# Altium PCB PCB1.PcbDoc
Units mil, origin at the board's own origin, x right, y up, seen from the top; angles counter-clockwise.
Board outline 457.48 x 807.09 mil, 2 copper layers (Top Layer, Bottom Layer), stack 61.811 mil thick; 3 components, 4 nets, 12 pads, 0 vias.
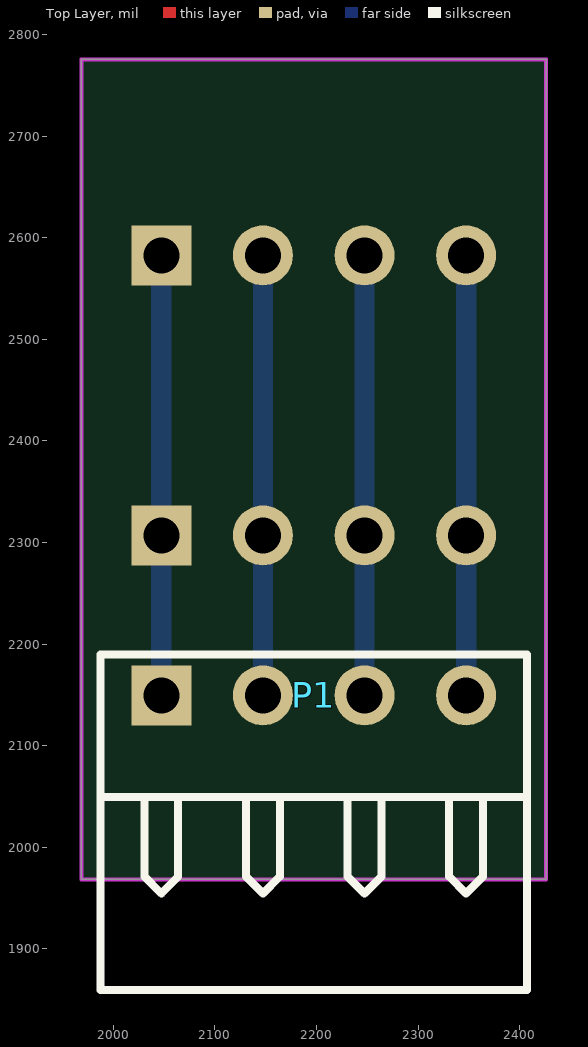
[diagram p0: Top Layer view]
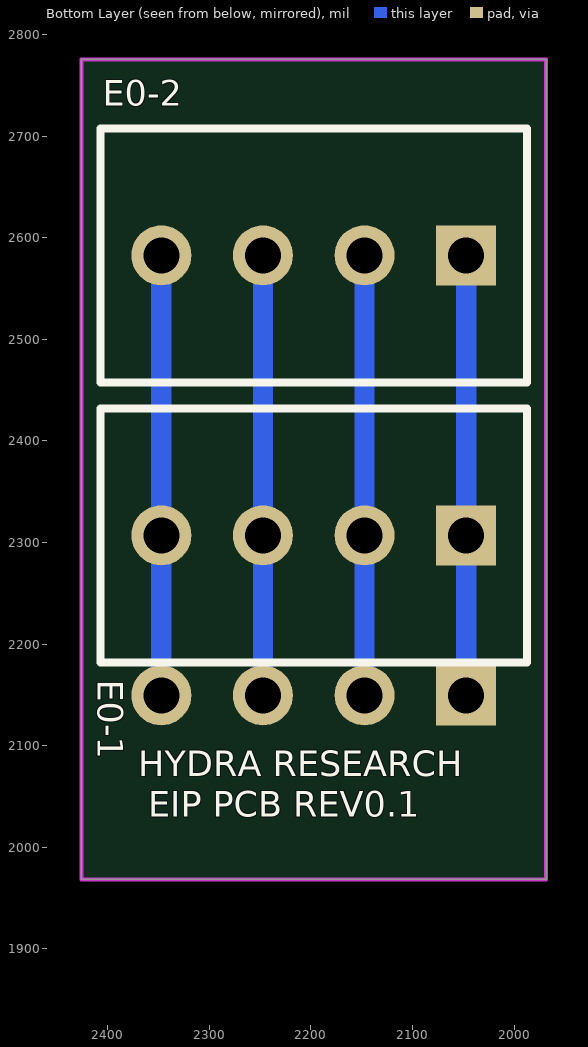
[diagram p1: Bottom Layer view, seen from below]

## Layer stack, top to bottom
Top Solder: solder mask 0.3937, Solder Resist, Dk 3.5
Top Layer: signal copper 1.378
Dielectric 1: dielectric 59.0551, FR-4, Dk 4.8
Bottom Layer: signal copper 1.378
Bottom Solder: solder mask 0.3937, Solder Resist, Dk 3.5

## Board outline
1968.5,1968.5 2425.98,1968.5 2425.98,2775.59 1968.5,2775.59

## Design rules (kind name [scope] priority, off if disabled: settings)
Clearance [All] p1: gap=10 ignorepadtopadclearanceinfootprint=FALSE except(0: Arc-Hole Track-Hole SMDPad-Hole THPad-Hole Via-Hole Fill-Hole Poly-Hole Region-Hole Text-Hole; 0.39: Arc-Arc Arc-Track Arc-SMDPad Arc-THPad Track-Track Track-SMDPad Track-THPad SMDPad-SMDPad SMDPad-THPad THPad-THPad)
ComponentClearance [All] p1: gap=9.84 collisioncheckmode=3 verticalgap=0 showdistances=FALSE
MinimumSolderMaskSliver [All] p1: minsoldermaskwidth=1
PolygonConnect [All] p1: connectstyle=Relief reliefconductorwidth=10 reliefentries=4 polygonreliefangle="90 Angle" airgapwidth=10
RoomDefinition "EIP PCB0.1" [InComponentClass('EIP PCB0.1')] p1 off: confinementstyle=ConfineIn formatcopy=TRUE lockcomponents=FALSE outline 2900.5,2960 5285.5,2960 5285.5,4270.47 2900.5,4270.47
RoutingVias [All] p1: holewidth=28 width=50 viastyle="Through Hole" minholewidth=28 minwidth=50 maxholewidth=28 maxwidth=50
ShortCircuit [InPadClass('All Pads') vs InPadClass('All Pads')] p1: allowed=TRUE
SilkToSolderMaskClearance [IsPad] p1 off: minsilkscreentomaskgap=10 clearancetoexposedcopper=TRUE
SolderMaskExpansion [All] p1: expansion=4
Width [All] p1: maxlimit=30 minlimit=10 preferedwidth=20
26 further rules are at their usual default settings.

## Components (designator, comment, footprint, x,y, rotation, side; value= is the part's Value field where it differs from the comment)
E0-1 "Header 4" HDR1X4 2197.24,2307.09 r0 bottom
E0-2 "Header 4" HDR1X4 2197.24,2582.68 r0 bottom
P1 "Header 4H" HDR1X4H 2047.24,2149.61 r0 top

## Footprints (in the part's own frame and the unit in brackets; to place one, negate y for a bottom-side part, rotate by r counter-clockwise, add the part's x,y. Pads: shape width x height; smd on the part's side, far side on the other; paste and mask are expansions set on the pad)
HDR1X4 [mm] "Connector; Header; 4 Position"
  rect 1.5x1.5 hole 0.9: 1(-3.81,0)
  round 1.5 hole 0.9: 2(-1.27,0) 3(1.27,0) 4(3.81,0)
  silkscreen extent -5.33,-3.17 5.33,3.17, body extent -5.08,-2.9 5.08,2.9, height 10.88
HDR1X4H [mm] "Connector; Header; 4 Position; Right Angle"
  rect 1.5x1.5 hole 0.9: 1(0,0)
  round 1.5 hole 0.9: 2(2.54,0) 3(5.08,0) 4(7.62,0)
  silkscreen extent -1.52,-7.37 9.14,1.02, body extent -1.22,-7.11 8.84,0.76, height 4.7

## Part data
E0-1 E0-2: "CONN HEADER 4POS .100 VERT TIN", Digi-Key Part Number=WM4113-ND, Manufacturer="Molex, LLC", Manufacturer Part Number=0022272041, Supplier=Digi-Key
P1: "CONN RECEPT 4POS .100 R/A PCB", Digi-Key Part Number=WM3002-ND, Manufacturer Part Number=0022152046, Publisher="Molex Connector Corporation", Supplier=Digi-Key

## Nets (pads, with @x,y where several pads share a name; then routed paths per layer and width w, separated by ;. In a path a pad name is that pad's centre, name@x,y a point inside that pad or via, vN(x,y) a via of type N, cw(c..) or ccw(c..) an arc to the next point about the centre after c; other vN are vias at no path point)
Net_1: E0-1.1 E0-2.1 P1.1 | length 433.1
  Bottom Layer w20: P1.1 E0-1.1 E0-2.1
Net_2: E0-1.2 E0-2.2 P1.2 | length 433.1
  Bottom Layer w20: P1.2 E0-1.2 E0-2.2
Net_3: E0-1.3 E0-2.3 P1.3 | length 433.1
  Bottom Layer w20: P1.3 E0-1.3 E0-2.3
Net_4: E0-1.4 E0-2.4 P1.4 | length 433.1
  Bottom Layer w20: P1.4 E0-1.4 E0-2.4

## Keep-outs
Keep-Out Layer:
  lines w2: 1967.5,1968.5 ccw(c1968.5,1968.5) 1968.5,1967.5 ; 1967.5,1968.5 ccw(c1968.5,1968.5) 1968.5,1967.5 ; 1967.5,1968.5 1967.5,2775.59 ; 1967.5,2775.59 cw(c1968.5,2775.59) 1968.5,2776.59 ; 1967.5,2775.59 cw(c1968.5,2775.59) 1968.5,2776.59 ; 1968.5,1967.5 2425.98,1967.5 ; 1968.5,2776.59 2425.98,2776.59 ; 2425.98,1967.5 ccw(c2425.98,1968.5) 2426.99,1968.5 ; 2425.98,1967.5 ccw(c2425.98,1968.5) 2426.99,1968.5 ; 2425.98,2776.59 cw(c2425.98,2775.59) 2426.99,2775.59 ; 2425.98,2776.59 cw(c2425.98,2775.59) 2426.99,2775.59 ; 2426.99,1968.5 2426.99,2775.59 ; 1969.5,1969.5 1969.5,2774.59 2424.98,2774.59 2424.98,1969.5 1969.5,1969.5

## Silkscreen, mask and mechanical layers (free items; w line width, h text height)
Bottom Overlay:
  text "HYDRA RESEARCH" at 2370,2070 h25
  text "EIP PCB REV0.1" at 2360,2030 h25
Mechanical 1:
  the board outline again, w7.87
Drill Drawing:
  drawing of 211 lines, arcs and shapes, not listed
  text "Symbol" at 2707.5,3332.5 h72
  text "Count" at 3213.38,3332.5 h72
  text "Hole Size" at 3743.24,3332.5 h72
  text "Plated" at 4842.92,3332.5 h72
  text "Hole Type" at 5348.8,3332.5 h72
  text "Drill Layer Pair" at 6082.6,3332.5 h72
  text "Via/Pad" at 7582.15,3332.5 h72
  text "Pad Shape" at 8172,3332.5 h72
  text "Template" at 8917.79,3332.5 h72
  text "Description" at 9567.62,3332.5 h72
  text "Hole Tolerance (+)" at 10421.39,3332.5 h72
  text "Hole Tolerance (-)" at 11754.99,3332.5 h72
  text "12" at 3213.38,3182.5 h60
  text "0.900mm (35.43mil)" at 3743.24,3182.5 h60
  text "PTH" at 4842.92,3182.5 h60
  text "Round" at 5348.8,3182.5 h60
  text "Top Layer - Bottom Layer" at 6082.6,3182.5 h60
  text "Pad" at 7582.15,3182.5 h60
  text "(Mixed)" at 8172,3182.5 h60
  text "(Mixed)" at 8917.79,3182.5 h60
  text "12 Total" at 3213.38,3032.5 h60
  text "Layer" at 2672.5,2842.5 h60
  text "Name" at 3082.41,2842.5 h60
  text "Material" at 4012.16,2842.5 h60
  text "Thickness" at 4871.92,2842.5 h60
  text "Constant" at 5521.76,2842.5 h60
  text "Board Layer Stack" at 6091.62,2842.5 h60
  text "1" at 2672.5,2722.5 h60
  text "Top Overlay" at 3082.41,2722.5 h60
  text "2" at 2672.5,2602.5 h60
  text "Top Solder" at 3082.41,2602.5 h60
  text "Solder Resist" at 4012.16,2602.5 h60
  text "0.39mil" at 4871.92,2602.5 h60
  text "3.5" at 5521.76,2602.5 h60
  text "3" at 2672.5,2482.5 h60
  text "Top Layer" at 3082.41,2482.5 h60
  text "Copper" at 4012.16,2482.5 h60
  text "1.38mil" at 4871.92,2482.5 h60
  text "4" at 2672.5,2362.5 h60
  text "Dielectric 1" at 3082.41,2362.5 h60
  text "FR-4" at 4012.16,2362.5 h60
  text "59.06mil" at 4871.92,2362.5 h60
  text "4.8" at 5521.76,2362.5 h60
  text "5" at 2672.5,2242.5 h60
  text "Bottom Layer" at 3082.41,2242.5 h60
  text "Copper" at 4012.16,2242.5 h60
  text "1.38mil" at 4871.92,2242.5 h60
  text "6" at 2672.5,2122.5 h60
  text "Bottom Solder" at 3082.41,2122.5 h60
  text "Solder Resist" at 4012.16,2122.5 h60
  text "0.39mil" at 4871.92,2122.5 h60
  text "3.5" at 5521.76,2122.5 h60
  text "7" at 2672.5,2002.5 h60
  text "Bottom Overlay" at 3082.41,2002.5 h60

## Dimensions
2047.24,2307.09 to 2047.24,2149.61 on Drill Drawing
2047.24,2582.68 to 2047.24,2307.09 on Drill Drawing
1968.5,2775.59 to 2425.98,2775.59 on Drill Drawing
1968.5,2775.59 to 1968.5,1968.5 on Drill Drawing